# Altium PCB New_LXe_twr.PcbDoc (part 2 of 5)
Units mm, origin at the board's own origin, x right, y up, seen from the top; angles counter-clockwise.
Board outline 130 x 150 mm, 6 copper layers (Top Layer, Internal Plane 1, MidLayer1, MidLayer2, Internal Plane 2, Bottom Layer); 673 components, 504 nets, 5569 pads, 803 vias.
Unrouted connection lines stored in the file: 633.
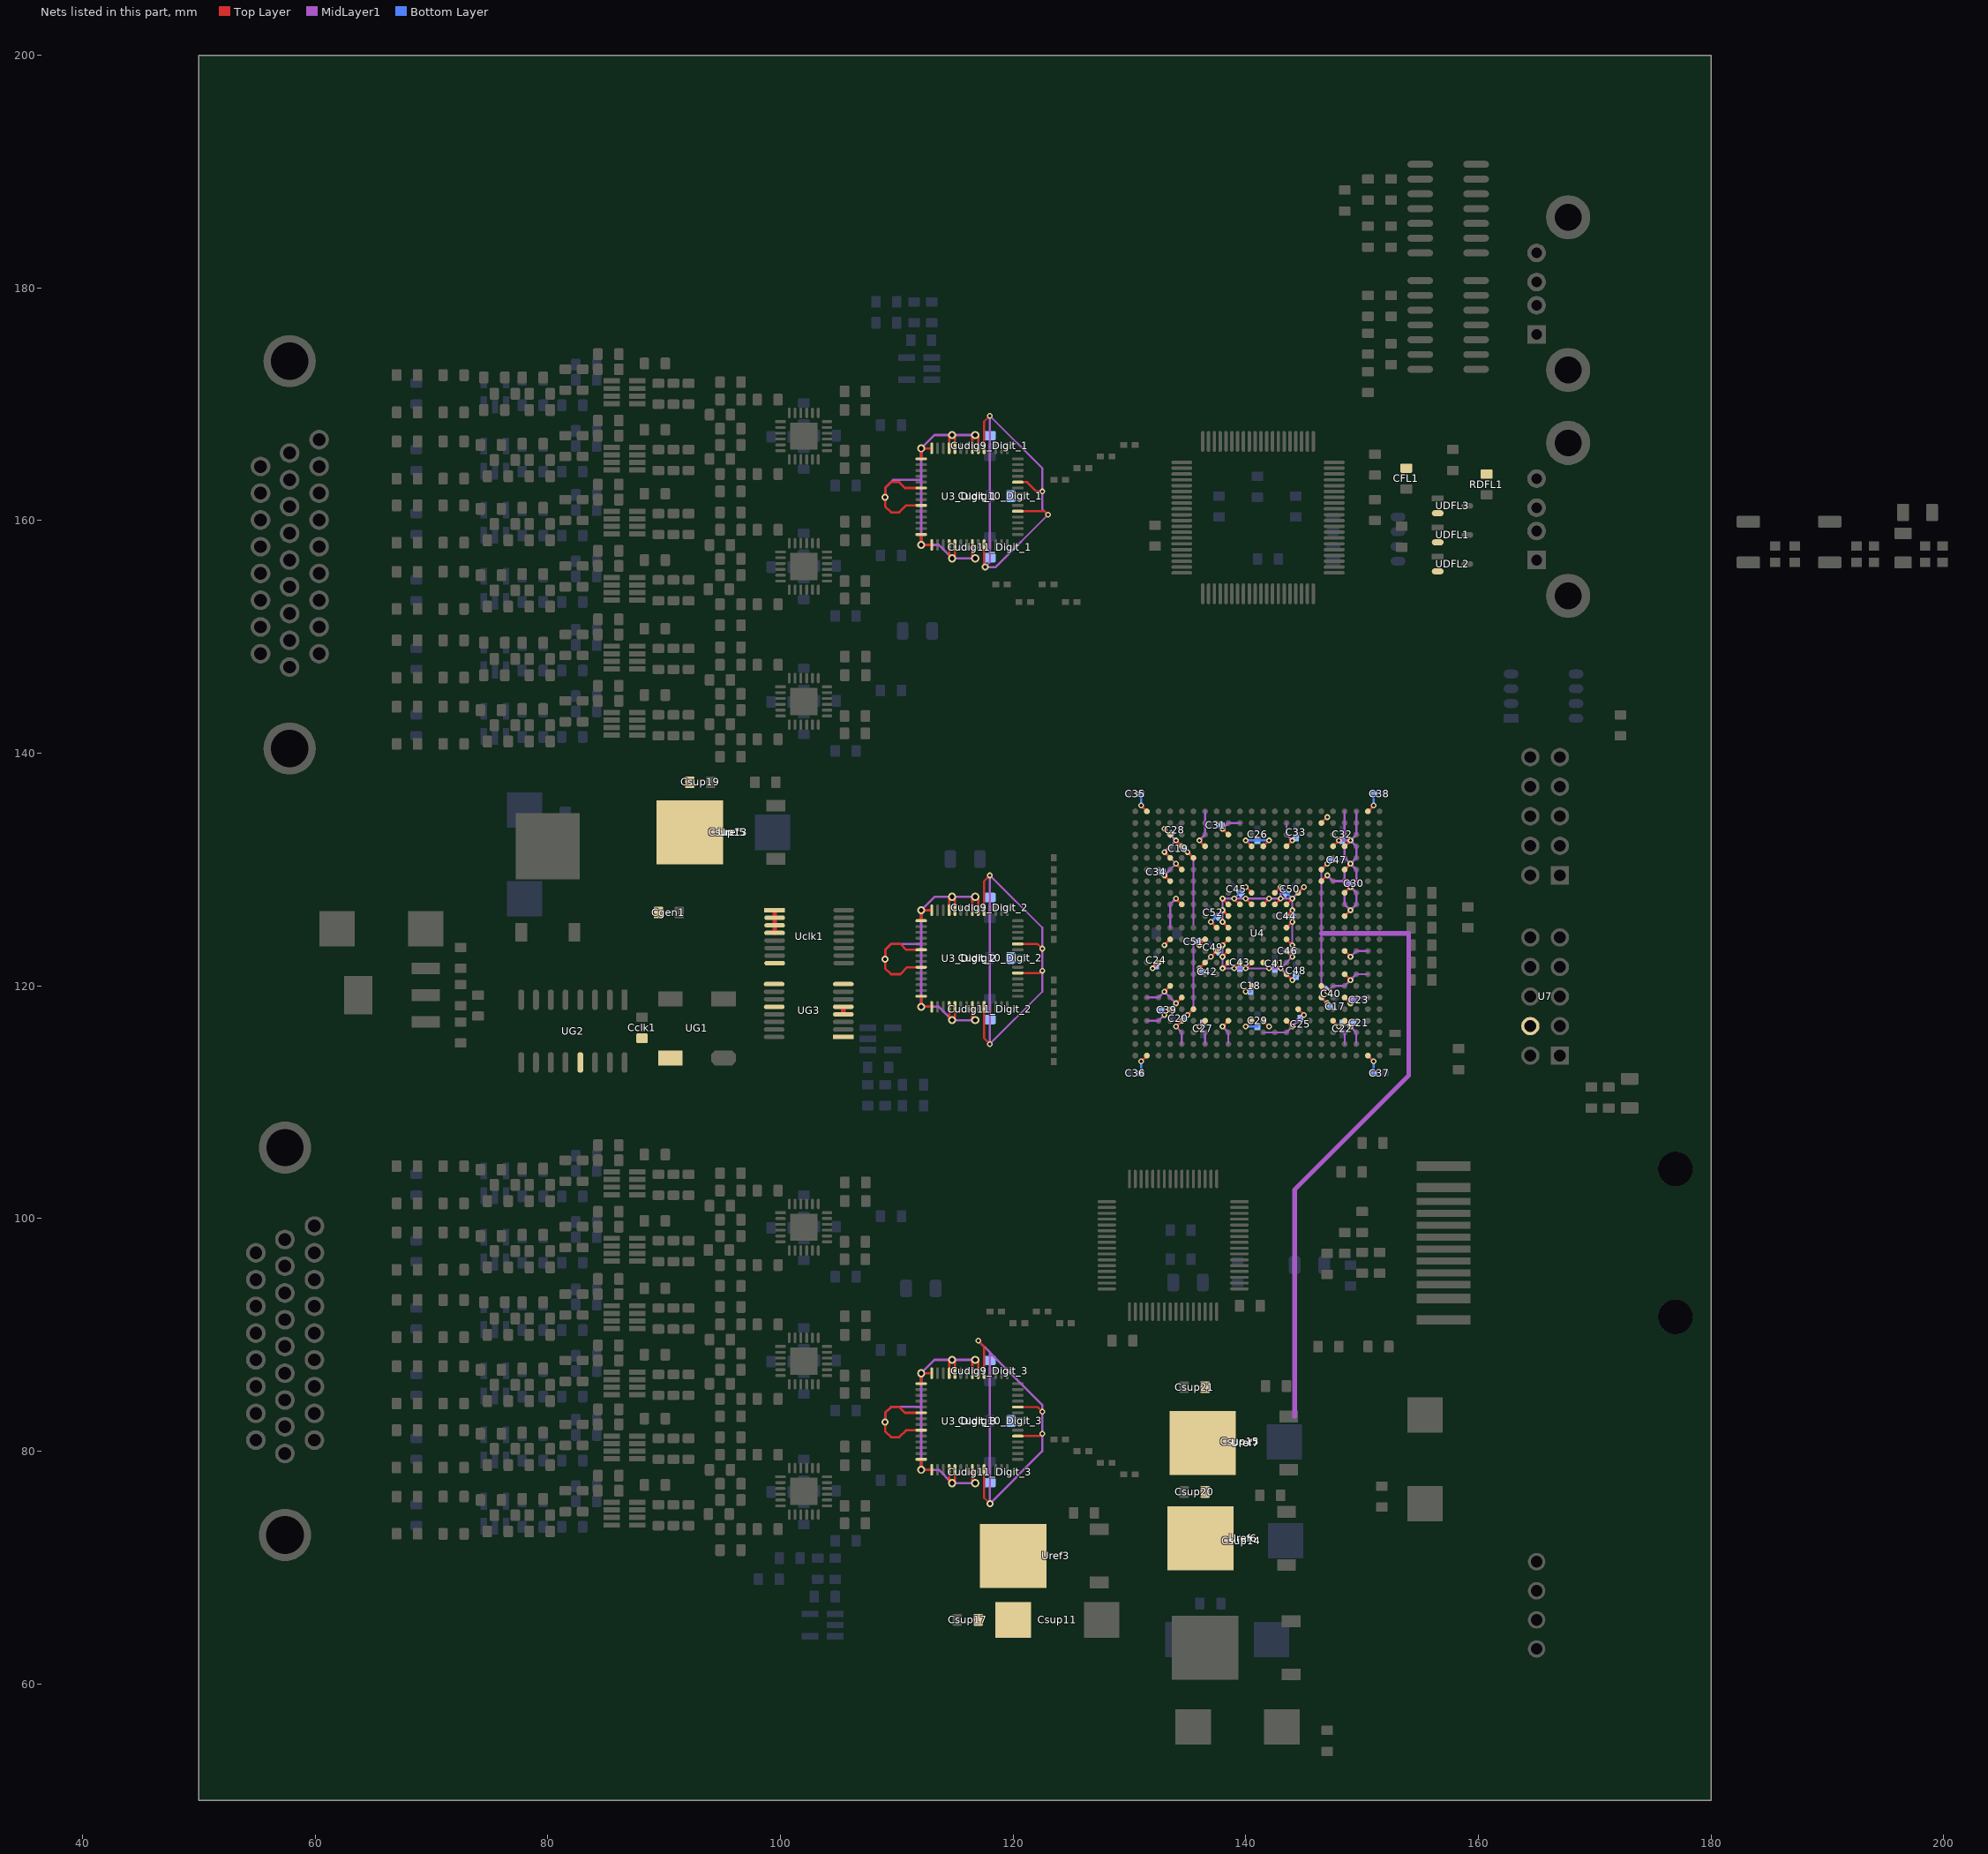
[diagram p6: the nets of this part, all layers, seen from the top]

## Components (designator, comment, footprint, x,y, rotation, side; value= is the part's Value field where it differs from the comment) (continued)
Rsh43_Digit_1 "91" ? 83,154.3 r90 top (schematic designator Rsh43)
Rsh43_Digit_2 "91" ? 83,97.5 r90 top (schematic designator Rsh43)
Rsh43_Digit_3 "91" ? 83,74.8 r90 top (schematic designator Rsh43)
Rsh44_Digit_1 "1k" ? 81.2,153 r0 bottom (schematic designator Rsh44)
Rsh44_Digit_2 "1k" ? 81.2,96.2 r0 bottom (schematic designator Rsh44)
Rsh44_Digit_3 "1k" ? 81.2,73.5 r0 bottom (schematic designator Rsh44)
Rsh45_Digit_1 "220" ? 81.5,173 r270 top (schematic designator Rsh45)
Rsh45_Digit_2 "220" ? 81.5,150.2 r270 top (schematic designator Rsh45)
Rsh45_Digit_3 "220" ? 81.5,93.5 r270 top (schematic designator Rsh45)
Rsh46_Digit_1 "220" ? 81.5,167.3 r270 top (schematic designator Rsh46)
Rsh46_Digit_2 "220" ? 81.5,144.5 r270 top (schematic designator Rsh46)
Rsh46_Digit_3 "220" ? 81.5,87.8 r270 top (schematic designator Rsh46)
Rsh47_Digit_1 "220" ? 81.5,161.8 r270 top (schematic designator Rsh47)
Rsh47_Digit_2 "220" ? 81.5,105 r270 top (schematic designator Rsh47)
Rsh47_Digit_3 "220" ? 81.5,82.3 r270 top (schematic designator Rsh47)
Rsh48_Digit_1 "220" ? 81.5,156.1 r270 top (schematic designator Rsh48)
Rsh48_Digit_2 "220" ? 81.5,99.3 r270 top (schematic designator Rsh48)
Rsh48_Digit_3 "220" ? 81.5,76.6 r270 top (schematic designator Rsh48)
Rsh49_Digit_1 "220" ? 84.3,173 r0 top (schematic designator Rsh49)
Rsh49_Digit_2 "220" ? 84.3,150.2 r0 top (schematic designator Rsh49)
Rsh49_Digit_3 "220" ? 84.3,93.5 r0 top (schematic designator Rsh49)
Rsh50_Digit_1 "220" ? 84.3,167.3 r0 top (schematic designator Rsh50)
Rsh50_Digit_2 "220" ? 84.3,144.5 r0 top (schematic designator Rsh50)
Rsh50_Digit_3 "220" ? 84.3,87.8 r0 top (schematic designator Rsh50)
Rsh51_Digit_1 "220" ? 84.3,161.8 r0 top (schematic designator Rsh51)
Rsh51_Digit_2 "220" ? 84.3,105 r0 top (schematic designator Rsh51)
Rsh51_Digit_3 "220" ? 84.3,82.3 r0 top (schematic designator Rsh51)
Rsh52_Digit_1 "220" ? 84.3,156.1 r0 top (schematic designator Rsh52)
Rsh52_Digit_2 "220" ? 84.3,99.3 r0 top (schematic designator Rsh52)
Rsh52_Digit_3 "220" ? 84.3,76.6 r0 top (schematic designator Rsh52)
Rsh53_Digit_1 "270" ? 89.5,170 r90 top (schematic designator Rsh53)
Rsh53_Digit_2 "270" ? 89.5,147.2 r90 top (schematic designator Rsh53)
Rsh53_Digit_3 "270" ? 89.5,90.5 r90 top (schematic designator Rsh53)
Rsh54_Digit_1 "360" ? 90.8,170 r90 top (schematic designator Rsh54)
Rsh54_Digit_2 "360" ? 90.8,147.2 r90 top (schematic designator Rsh54)
Rsh54_Digit_3 "360" ? 90.8,90.5 r90 top (schematic designator Rsh54)
Rsh55_Digit_1 "270" ? 89.5,164.3 r90 top (schematic designator Rsh55)
Rsh55_Digit_2 "270" ? 89.5,141.5 r90 top (schematic designator Rsh55)
Rsh55_Digit_3 "270" ? 89.5,84.8 r90 top (schematic designator Rsh55)
Rsh56_Digit_1 "360" ? 90.8,164.3 r90 top (schematic designator Rsh56)
Rsh56_Digit_2 "360" ? 90.8,141.5 r90 top (schematic designator Rsh56)
Rsh56_Digit_3 "360" ? 90.8,84.8 r90 top (schematic designator Rsh56)
Rsh57_Digit_1 "270" ? 89.5,158.8 r90 top (schematic designator Rsh57)
Rsh57_Digit_2 "270" ? 89.5,102 r90 top (schematic designator Rsh57)
Rsh57_Digit_3 "270" ? 89.5,79.3 r90 top (schematic designator Rsh57)
Rsh58_Digit_1 "360" ? 90.8,158.8 r90 top (schematic designator Rsh58)
Rsh58_Digit_2 "360" ? 90.8,102 r90 top (schematic designator Rsh58)
Rsh58_Digit_3 "360" ? 90.8,79.3 r90 top (schematic designator Rsh58)
Rsh59_Digit_1 "270" ? 89.5,153.1 r90 top (schematic designator Rsh59)
Rsh59_Digit_2 "270" ? 89.5,96.3 r90 top (schematic designator Rsh59)
Rsh59_Digit_3 "270" ? 89.5,73.6 r90 top (schematic designator Rsh59)
Rsh60_Digit_1 "360" ? 90.8,153.1 r90 top (schematic designator Rsh60)
Rsh60_Digit_2 "360" ? 90.8,96.3 r90 top (schematic designator Rsh60)
Rsh60_Digit_3 "360" ? 90.8,73.6 r90 top (schematic designator Rsh60)
RSL1 "1K2" chip0603#1 150.5,187.55 r90 top
RSL2 "56" chip0603#1 150.5,185.3 r270 top
RSL3 "56" chip0603#1 148.5,186.6 r90 top
RSL4 "1K2" chip0603#1 152.5,183.5 r90 top
RSL5 "1K2" chip0603#1 150.5,177.55 r90 top
RSL6 "56" chip0603#1 150.5,172.8 r270 top
RSL7 "56" chip0603#1 150.5,176.1 r270 top
RSL8 "1K2" chip0603#1 152.5,173.4 r90 top
U1_Digit_1 "AD4932-2" CP-24-13 100,168.5 r0 top (schematic designator U1)
U1_Digit_2 "AD4932-2" CP-24-13 100,145.7 r0 top (schematic designator U1)
U1_Digit_3 "AD4932-2" CP-24-13 100,89 r0 top (schematic designator U1)
U2_Digit_1 "AD4932-2" CP-24-13 100,157.3 r0 top (schematic designator U2)
U2_Digit_2 "AD4932-2" CP-24-13 100,100.5 r0 top (schematic designator U2)
U2_Digit_3 "AD4932-2" CP-24-13 100,77.8 r0 top (schematic designator U2)
U3_Digit_1 "ADC3424 / ADC3444" PQFN-56 119.5,166.2 r270 top (schematic designator U3)
U3_Digit_2 "ADC3424 / ADC3444" PQFN-56 119.5,126.5 r270 top (schematic designator U3)
U3_Digit_3 "ADC3424 / ADC3444" PQFN-56 119.5,86.7 r270 top (schematic designator U3)
U4 "EP4CE40F23C7" FBGA484 141,124.5 r180 top
U5 "Active Serial" IDC10 167,129.5 r90 top
U6 "EPCS16SI8N" 8SO200 162.8,143 r90 bottom
U7 "JTAG" IDC10 167,114 r90 top
U8 "LXT972A" TQFP64 130,92 r0 top
Uclk1 "IDT_854105I" TSSOP16 99.5,126.5 r0 top
UDFL1 "BAV99" SOT323 156.5,159.4 r270 top
UDFL2 "BAV99" SOT323 156.5,156.9 r270 top
UDFL3 "BAV99" SOT323 156.5,161.9 r270 top
UFL1 "DS92LV16TVHG" VHG80A_N 141.05,160.25 r0 top
UFL2 "DS90LV001" 8SO200 147.5,156.5 r90 bottom
UG1 "KXO-97" SG-636 95.1,113.8 r180 top
UG2 "MAX4651PP" 16SOIC150 86.6,118.8 r270 top
UG3 "5V926(PLL)" TSSOP16 105.4,115.6 r180 top
UL1 "DS36C200" M14A_N 157.4,186.81 r0 top
UL2 "DS36C200" M14A_N 157.4,176.81 r0 top
Uref2 "NCP1117-5V" 369A-13 80,128.3 r0 top
Uref3 "NCP1117-1.8V" 369A-13 123.7,71 r90 top
Uref4 "NCP1117-3.3V" 369A-13 140.2,63.1 r90 top
Uref5 "NCP1117-3.3V" 369A-13 95.9,133.2 r90 top
Uref6 "NCP1117-2.5V" 369A-13 139.8,72.5 r90 top
Uref7 "LD1117-1.25V" 369A-13 140,80.7 r90 top
Uref8 "LM337" SOT223_N 66.6,119.2 r180 top
Ush1_Digit_1 "AD8014" RT-5 75.45,171.025 r180 bottom (schematic designator Ush1)
Ush1_Digit_2 "AD8014" RT-5 75.45,148.225 r180 bottom (schematic designator Ush1)
Ush1_Digit_3 "AD8014" RT-5 75.45,91.525 r180 bottom (schematic designator Ush1)
Ush2_Digit_1 "AD8014" RT-5 75.45,165.325 r180 bottom (schematic designator Ush2)
Ush2_Digit_2 "AD8014" RT-5 75.45,142.525 r180 bottom (schematic designator Ush2)
Ush2_Digit_3 "AD8014" RT-5 75.45,85.825 r180 bottom (schematic designator Ush2)
Ush3_Digit_1 "AD8014" RT-5 75.45,159.825 r180 bottom (schematic designator Ush3)
Ush3_Digit_2 "AD8014" RT-5 75.45,103.025 r180 bottom (schematic designator Ush3)
Ush3_Digit_3 "AD8014" RT-5 75.45,80.325 r180 bottom (schematic designator Ush3)
Ush4_Digit_1 "AD8014" RT-5 75.45,154.125 r180 bottom (schematic designator Ush4)
Ush4_Digit_2 "AD8014" RT-5 75.45,97.325 r180 bottom (schematic designator Ush4)
Ush4_Digit_3 "AD8014" RT-5 75.45,74.625 r180 bottom (schematic designator Ush4)
Ush5_Digit_1 "AD8039" SOT23-8 86.6,171.025 r270 top (schematic designator Ush5)
Ush5_Digit_2 "AD8039" SOT23-8 86.6,148.225 r270 top (schematic designator Ush5)
Ush5_Digit_3 "AD8039" SOT23-8 86.6,91.525 r270 top (schematic designator Ush5)
Ush6_Digit_1 "AD8039" SOT23-8 86.6,165.325 r270 top (schematic designator Ush6)
Ush6_Digit_2 "AD8039" SOT23-8 86.6,142.525 r270 top (schematic designator Ush6)
Ush6_Digit_3 "AD8039" SOT23-8 86.6,85.825 r270 top (schematic designator Ush6)
Ush7_Digit_1 "AD8039" SOT23-8 86.6,159.825 r270 top (schematic designator Ush7)
Ush7_Digit_2 "AD8039" SOT23-8 86.6,103.025 r270 top (schematic designator Ush7)
Ush7_Digit_3 "AD8039" SOT23-8 86.6,80.325 r270 top (schematic designator Ush7)
Ush8_Digit_1 "AD8039" SOT23-8 86.6,154.125 r270 top (schematic designator Ush8)
Ush8_Digit_2 "AD8039" SOT23-8 86.6,97.325 r270 top (schematic designator Ush8)
Ush8_Digit_3 "AD8039" SOT23-8 86.6,74.625 r270 top (schematic designator Ush8)
Usup1_Digit_1 "AD8005ART" SOT23-5 111.925,173.05 r270 bottom (schematic designator Usup1)
Usup1_Digit_2 "AD8005ART" SOT23-5 108.575,115.45 r90 bottom (schematic designator Usup1)
Usup1_Digit_3 "AD8005ART" SOT23-5 103.625,65.05 r270 bottom (schematic designator Usup1)
VDLED1 "LED" LED0805 196.5,156.4 r90 top
VDLED2 "LED" LED1206 190.2,156.4 r90 top
VDLED3 "LED" LED1206 183.2,156.4 r90 top
VDLED4 "LED" LED0805 173,109.5 r90 top
XFL "USB_A" USB2.5-2H4B 178.49,160.1 r0 top
XSL "USB_A" USB2.5-2H4B 178.49,179.5 r0 top

## Footprints (in the part's own frame and the unit in brackets; to place one, negate y for a bottom-side part, rotate by r counter-clockwise, add the part's x,y. Pads: shape width x height; smd on the part's side, far side on the other; paste and mask are expansions set on the pad)
8SO200 [mil]
  rect 30x50 smd: 1(0,0)
  oval 30x50 smd: 2(50,0) 3(100,0) 4(150,0) 5(150,220) 6(100,220) 7(50,220) 8(0,220)
  silkscreen extent -20,40 170,180
16SOIC150 [mil]
  rect 70x20 smd: 1(0,0)
  oval 70x20 smd: 2(0,-50) 3(0,-100) 4(0,-150) 5(0,-200) 6(0,-250) 7(0,-300) 8(0,-350) 9(212,-350) 10(212,-300) 11(212,-250) 12(212,-200) 13(212,-150) 14(212,-100) 15(212,-50) 16(212,0)
  silkscreen extent 31,-375 181,25
369A-13 [mm] "D-PAK/TO-252-AA; 3 Leads (1 Cropped); Body 10.3 (inc. leads) x 6.7 mm (LxW max)"
  rect 1x1.6 smd: 1(-2.285,-3.7) 3(2.285,-3.7)
  rect 5.5x5.7 smd: 4(0,3.7)
  silkscreen extent -3.09,-4.4 3.09,6.45
0402 [mm] "Chip Capacitor, Body 1.0x0.5mm, IPC High Density"
  rect 0.6x0.5 smd: 1(-0.5,0) 2(0.5,0)
  body extent -0.55,-0.3 0.55,0.3, height 1.3
1608[0603] [mm] "Chip Capacitor, Body 1.6x0.8mm, IPC High Density"
  rect 0.8x0.9 smd: 1(-0.7,0) 2(0.7,0)
  body extent -0.87,-0.48 0.87,0.48, height 1.3
CEL-SMD300 [mil]
  rect 120x120 smd: +(0,0) -(300,0)
  silkscreen extent -10,-90 310,90
chip0603#1 [mm]
  rrect20% 0.8x1 smd: 1(0,0) 2(1.8,0)
  silkscreen extent -0.6,-0.8 2.4,0.8
chip0603#2 [mm]
  rect 0.6x1 smd: 1(0,0) 2(1.6,0)
  silkscreen extent -0.6,-0.8 2.2,0.8
chip0805#1 [mm]
  rrect20% 1x1.5 smd: 1(0,0) 2(2.5,0)
  silkscreen extent 0.25,-0.64 2.29,0.64
chip0805#2 [mm]
  oval 0.508x1.524 smd: 1(-0.254,0) 1(0,0) 1(0.254,0) 2(2.286,0) 2(2.54,0) 2(2.794,0)
  oval 1.016x0.508 smd: 1(0,-0.508) 1(0,0.508) 2(2.54,-0.508) 2(2.54,0.508)
  silkscreen extent 0.25,-0.64 2.29,0.64
CP-24-13 [mm]
  rect 0.9x0.25 smd: 1(0,0)
  oval 0.9x0.25 smd: 2(0,-0.5) 3(0,-1) 4(0,-1.5) 5(0,-2) 6(0,-2.5) 13(4,-2.5) 14(4,-2) 15(4,-1.5) 16(4,-1) 17(4,-0.5) 18(4,0)
  oval 0.25x0.9 smd: 7(0.75,-3.25) 8(1.25,-3.25) 9(1.75,-3.25) 10(2.25,-3.25) 11(2.75,-3.25) 12(3.25,-3.25) 19(3.25,0.75) 20(2.75,0.75) 21(2.25,0.75) 22(1.75,0.75) 23(1.25,0.75) 24(0.75,0.75)
  rect 2.34x2.34 smd: 25(2,-1.25)
  silkscreen extent 0,-3.25 4,0.75
CWF-4R [mm]
  round 1.5 hole 1: 1(0,0) 2(0,2.5) 3(0,5) 4(0,7.5)
  silkscreen extent -3.5,-3.35 14.5,10.85
DHR-F-26 [mm]
  round 1.69 hole 1.09: 1(8.15,-2.54) 2(10.45,-2.54) 3(12.75,-2.54) 4(15.05,-2.54) 5(17.35,-2.54) 6(19.65,-2.54) 7(21.95,-2.54) 8(24.25,-2.54) 9(26.55,-2.54) 10(7,0) 11(9.3,0) 12(11.6,0) 13(13.9,0) 14(16.2,0) 15(18.5,0) 16(20.8,0) 17(23.1,0) 18(25.4,0) 19(8.15,2.5) 20(10.45,2.5) 21(12.75,2.5) 22(15.05,2.5) 23(17.35,2.5) 24(19.65,2.5) 25(21.95,2.5) 26(24.25,2.5)
  round 4.5 hole 3.24: 27(0,0)
  round 4.5 hole 3.2: 28(33.3,0)
  silkscreen extent -3.05,-4.83 36.35,18.08
FBGA484 [mm] "BGA, 484-Leads, Body 23x23mm, Pitch 1mm"
  round 0.5 smd: A1(-10.5,10.5) A2(-9.5,10.5) A3(-8.5,10.5) A4(-7.5,10.5) A5(-6.5,10.5) A6(-5.5,10.5) A7(-4.5,10.5) A8(-3.5,10.5) A9(-2.5,10.5) A10(-1.5,10.5) A11(-0.5,10.5) A12(0.5,10.5) A13(1.5,10.5) A14(2.5,10.5) A15(3.5,10.5) A16(4.5,10.5) A17(5.5,10.5) A18(6.5,10.5) A19(7.5,10.5) A20(8.5,10.5) A21(9.5,10.5) A22(10.5,10.5) AA1(-10.5,-9.5) AA2(-9.5,-9.5) AA3(-8.5,-9.5) AA4(-7.5,-9.5) AA5(-6.5,-9.5) AA6(-5.5,-9.5) AA7(-4.5,-9.5) AA8(-3.5,-9.5) AA9(-2.5,-9.5) AA10(-1.5,-9.5) AA11(-0.5,-9.5) AA12(0.5,-9.5) AA13(1.5,-9.5) AA14(2.5,-9.5) AA15(3.5,-9.5) AA16(4.5,-9.5) AA17(5.5,-9.5) AA18(6.5,-9.5) AA19(7.5,-9.5) AA20(8.5,-9.5) AA21(9.5,-9.5) AA22(10.5,-9.5) AB1(-10.5,-10.5) AB2(-9.5,-10.5) AB3(-8.5,-10.5) AB4(-7.5,-10.5) AB5(-6.5,-10.5) AB6(-5.5,-10.5) AB7(-4.5,-10.5) AB8(-3.5,-10.5) AB9(-2.5,-10.5) AB10(-1.5,-10.5) AB11(-0.5,-10.5) AB12(0.5,-10.5) AB13(1.5,-10.5) AB14(2.5,-10.5) AB15(3.5,-10.5) AB16(4.5,-10.5) AB17(5.5,-10.5) AB18(6.5,-10.5) AB19(7.5,-10.5) AB20(8.5,-10.5) AB21(9.5,-10.5) AB22(10.5,-10.5) B1(-10.5,9.5) B2(-9.5,9.5) B3(-8.5,9.5) B4(-7.5,9.5) B5(-6.5,9.5) B6(-5.5,9.5) B7(-4.5,9.5) B8(-3.5,9.5) B9(-2.5,9.5) B10(-1.5,9.5) B11(-0.5,9.5) B12(0.5,9.5) B13(1.5,9.5) B14(2.5,9.5) B15(3.5,9.5) B16(4.5,9.5) B17(5.5,9.5) B18(6.5,9.5) B19(7.5,9.5) B20(8.5,9.5) B21(9.5,9.5) B22(10.5,9.5) C1(-10.5,8.5) C2(-9.5,8.5) C3(-8.5,8.5) C4(-7.5,8.5) C5(-6.5,8.5) C6(-5.5,8.5) C7(-4.5,8.5) C8(-3.5,8.5) C9(-2.5,8.5) C10(-1.5,8.5) C11(-0.5,8.5) C12(0.5,8.5) C13(1.5,8.5) C14(2.5,8.5) C15(3.5,8.5) C16(4.5,8.5) C17(5.5,8.5) C18(6.5,8.5) C19(7.5,8.5) C20(8.5,8.5) C21(9.5,8.5) C22(10.5,8.5) D1(-10.5,7.5) D2(-9.5,7.5) D3(-8.5,7.5) D4(-7.5,7.5) D5(-6.5,7.5) D6(-5.5,7.5) D7(-4.5,7.5) D8(-3.5,7.5) D9(-2.5,7.5) D10(-1.5,7.5) D11(-0.5,7.5) D12(0.5,7.5) D13(1.5,7.5) D14(2.5,7.5) D15(3.5,7.5) D16(4.5,7.5) D17(5.5,7.5) D18(6.5,7.5) D19(7.5,7.5) D20(8.5,7.5) D21(9.5,7.5) D22(10.5,7.5) E1(-10.5,6.5) E2(-9.5,6.5) E3(-8.5,6.5) E4(-7.5,6.5) E5(-6.5,6.5) E6(-5.5,6.5) E7(-4.5,6.5) E8(-3.5,6.5) E9(-2.5,6.5) E10(-1.5,6.5) E11(-0.5,6.5) E12(0.5,6.5) E13(1.5,6.5) E14(2.5,6.5) E15(3.5,6.5) E16(4.5,6.5) E17(5.5,6.5) E18(6.5,6.5) E19(7.5,6.5) E20(8.5,6.5) E21(9.5,6.5) E22(10.5,6.5) F1(-10.5,5.5) F2(-9.5,5.5) F3(-8.5,5.5) F4(-7.5,5.5) F5(-6.5,5.5) F6(-5.5,5.5) F7(-4.5,5.5) F8(-3.5,5.5) F9(-2.5,5.5) F10(-1.5,5.5) F11(-0.5,5.5) F12(0.5,5.5) F13(1.5,5.5) F14(2.5,5.5) F15(3.5,5.5) F16(4.5,5.5) F17(5.5,5.5) F18(6.5,5.5) F19(7.5,5.5) F20(8.5,5.5) F21(9.5,5.5) F22(10.5,5.5) G1(-10.5,4.5) G2(-9.5,4.5) G3(-8.5,4.5) G4(-7.5,4.5) G5(-6.5,4.5) G6(-5.5,4.5) G7(-4.5,4.5) G8(-3.5,4.5) G9(-2.5,4.5) G10(-1.5,4.5) G11(-0.5,4.5) G12(0.5,4.5) G13(1.5,4.5) G14(2.5,4.5) G15(3.5,4.5) G16(4.5,4.5) G17(5.5,4.5) G18(6.5,4.5) G19(7.5,4.5) G20(8.5,4.5) G21(9.5,4.5) G22(10.5,4.5) H1(-10.5,3.5) H2(-9.5,3.5) H3(-8.5,3.5) H4(-7.5,3.5) H5(-6.5,3.5) H6(-5.5,3.5) H7(-4.5,3.5) H8(-3.5,3.5) H9(-2.5,3.5) H10(-1.5,3.5) H11(-0.5,3.5) H12(0.5,3.5) H13(1.5,3.5) H14(2.5,3.5) H15(3.5,3.5) H16(4.5,3.5) H17(5.5,3.5) H18(6.5,3.5) H19(7.5,3.5) H20(8.5,3.5) H21(9.5,3.5) H22(10.5,3.5) J1(-10.5,2.5) J2(-9.5,2.5) J3(-8.5,2.5) J4(-7.5,2.5) J5(-6.5,2.5) J6(-5.5,2.5) J7(-4.5,2.5) J8(-3.5,2.5) J9(-2.5,2.5) J10(-1.5,2.5) J11(-0.5,2.5) J12(0.5,2.5) J13(1.5,2.5) J14(2.5,2.5) J15(3.5,2.5) J16(4.5,2.5) J17(5.5,2.5) J18(6.5,2.5) J19(7.5,2.5) J20(8.5,2.5) J21(9.5,2.5) J22(10.5,2.5) K1(-10.5,1.5) K2(-9.5,1.5) K3(-8.5,1.5) K4(-7.5,1.5) K5(-6.5,1.5) K6(-5.5,1.5) K7(-4.5,1.5) K8(-3.5,1.5) K9(-2.5,1.5) K10(-1.5,1.5) K11(-0.5,1.5) K12(0.5,1.5) K13(1.5,1.5) K14(2.5,1.5) K15(3.5,1.5) K16(4.5,1.5) K17(5.5,1.5) K18(6.5,1.5) K19(7.5,1.5) K20(8.5,1.5) K21(9.5,1.5) K22(10.5,1.5) L1(-10.5,0.5) L2(-9.5,0.5) L3(-8.5,0.5) L4(-7.5,0.5) L5(-6.5,0.5) L6(-5.5,0.5) L7(-4.5,0.5) L8(-3.5,0.5) L9(-2.5,0.5) L10(-1.5,0.5) L11(-0.5,0.5) L12(0.5,0.5) L13(1.5,0.5) L14(2.5,0.5) L15(3.5,0.5) L16(4.5,0.5) L17(5.5,0.5) L18(6.5,0.5) L19(7.5,0.5) L20(8.5,0.5) L21(9.5,0.5) L22(10.5,0.5) M1(-10.5,-0.5) M2(-9.5,-0.5) M3(-8.5,-0.5) M4(-7.5,-0.5) M5(-6.5,-0.5) M6(-5.5,-0.5) M7(-4.5,-0.5) M8(-3.5,-0.5) M9(-2.5,-0.5) M10(-1.5,-0.5) M11(-0.5,-0.5) M12(0.5,-0.5) M13(1.5,-0.5) M14(2.5,-0.5) M15(3.5,-0.5) M16(4.5,-0.5) M17(5.5,-0.5) M18(6.5,-0.5) M19(7.5,-0.5) M20(8.5,-0.5) M21(9.5,-0.5) M22(10.5,-0.5) N1(-10.5,-1.5) N2(-9.5,-1.5) N3(-8.5,-1.5) N4(-7.5,-1.5) N5(-6.5,-1.5) N6(-5.5,-1.5) N7(-4.5,-1.5) N8(-3.5,-1.5) N9(-2.5,-1.5) N10(-1.5,-1.5) N11(-0.5,-1.5) N12(0.5,-1.5) N13(1.5,-1.5) N14(2.5,-1.5) N15(3.5,-1.5) N16(4.5,-1.5) N17(5.5,-1.5) N18(6.5,-1.5) N19(7.5,-1.5) N20(8.5,-1.5) N21(9.5,-1.5) N22(10.5,-1.5) P1(-10.5,-2.5) P2(-9.5,-2.5) P3(-8.5,-2.5) P4(-7.5,-2.5) P5(-6.5,-2.5) P6(-5.5,-2.5) P7(-4.5,-2.5) P8(-3.5,-2.5) P9(-2.5,-2.5) P10(-1.5,-2.5) P11(-0.5,-2.5) P12(0.5,-2.5) P13(1.5,-2.5) P14(2.5,-2.5) P15(3.5,-2.5) P16(4.5,-2.5) P17(5.5,-2.5) P18(6.5,-2.5) P19(7.5,-2.5) P20(8.5,-2.5) P21(9.5,-2.5) P22(10.5,-2.5) R1(-10.5,-3.5) R2(-9.5,-3.5) R3(-8.5,-3.5) R4(-7.5,-3.5) R5(-6.5,-3.5) R6(-5.5,-3.5) R7(-4.5,-3.5) R8(-3.5,-3.5) R9(-2.5,-3.5) R10(-1.5,-3.5) R11(-0.5,-3.5) R12(0.5,-3.5) R13(1.5,-3.5) R14(2.5,-3.5) R15(3.5,-3.5) R16(4.5,-3.5) R17(5.5,-3.5) R18(6.5,-3.5) R19(7.5,-3.5) R20(8.5,-3.5) R21(9.5,-3.5) R22(10.5,-3.5) T1(-10.5,-4.5) T2(-9.5,-4.5) T3(-8.5,-4.5) T4(-7.5,-4.5) T5(-6.5,-4.5) T6(-5.5,-4.5) T7(-4.5,-4.5) T8(-3.5,-4.5) T9(-2.5,-4.5) T10(-1.5,-4.5) T11(-0.5,-4.5) T12(0.5,-4.5) T13(1.5,-4.5) T14(2.5,-4.5) T15(3.5,-4.5) T16(4.5,-4.5) T17(5.5,-4.5) T18(6.5,-4.5) T19(7.5,-4.5) T20(8.5,-4.5) T21(9.5,-4.5) T22(10.5,-4.5) U1(-10.5,-5.5) U2(-9.5,-5.5) U3(-8.5,-5.5) U4(-7.5,-5.5) U5(-6.5,-5.5) U6(-5.5,-5.5) U7(-4.5,-5.5) U8(-3.5,-5.5) U9(-2.5,-5.5) U10(-1.5,-5.5) U11(-0.5,-5.5) U12(0.5,-5.5) U13(1.5,-5.5) U14(2.5,-5.5) U15(3.5,-5.5) U16(4.5,-5.5) U17(5.5,-5.5) U18(6.5,-5.5) U19(7.5,-5.5) U20(8.5,-5.5) U21(9.5,-5.5) U22(10.5,-5.5) V1(-10.5,-6.5) V2(-9.5,-6.5) V3(-8.5,-6.5) V4(-7.5,-6.5) V5(-6.5,-6.5) V6(-5.5,-6.5) V7(-4.5,-6.5) V8(-3.5,-6.5) V9(-2.5,-6.5) V10(-1.5,-6.5) V11(-0.5,-6.5) V12(0.5,-6.5) V13(1.5,-6.5) V14(2.5,-6.5) V15(3.5,-6.5) V16(4.5,-6.5) V17(5.5,-6.5) V18(6.5,-6.5) V19(7.5,-6.5) V20(8.5,-6.5) V21(9.5,-6.5) V22(10.5,-6.5) W1(-10.5,-7.5) W2(-9.5,-7.5) W3(-8.5,-7.5) W4(-7.5,-7.5) W5(-6.5,-7.5) W6(-5.5,-7.5) W7(-4.5,-7.5) W8(-3.5,-7.5) W9(-2.5,-7.5) W10(-1.5,-7.5) W11(-0.5,-7.5) W12(0.5,-7.5) W13(1.5,-7.5) W14(2.5,-7.5) W15(3.5,-7.5) W16(4.5,-7.5) W17(5.5,-7.5) W18(6.5,-7.5) W19(7.5,-7.5) W20(8.5,-7.5) W21(9.5,-7.5) W22(10.5,-7.5) Y1(-10.5,-8.5) Y2(-9.5,-8.5) Y3(-8.5,-8.5) Y4(-7.5,-8.5) Y5(-6.5,-8.5) Y6(-5.5,-8.5) Y7(-4.5,-8.5) Y8(-3.5,-8.5) Y9(-2.5,-8.5) Y10(-1.5,-8.5) Y11(-0.5,-8.5) Y12(0.5,-8.5) Y13(1.5,-8.5) Y14(2.5,-8.5) Y15(3.5,-8.5) Y16(4.5,-8.5) Y17(5.5,-8.5) Y18(6.5,-8.5) Y19(7.5,-8.5) Y20(8.5,-8.5) Y21(9.5,-8.5) Y22(10.5,-8.5)
  silkscreen extent -12.27,-11.5 11.5,11.5, body extent -11.5,-11.5 11.5,11.5, height 3.5
HR961160C [mm]
  rect 0.81x4.6 smd: 1(1.45,0) 2(3.29,0) 11(12.83,0) 12(14.67,0)
  rect 0.61x4.6 smd: 3(4.49,0) 4(5.51,0) 5(6.53,0) 6(7.55,0) 7(8.57,0) 8(9.59,0) 9(10.61,0) 10(11.63,0)
  round 3 hole 3: 13(1.7,19.92) 14(14.4,19.92)
  silkscreen extent 0,-2.25 16.1,28.73
IDC10 [mil]
  rect 62x62 hole 40: 1(0,0)
  round 62 hole 40: 2(0,100) 3(100,0) 4(100,100) 5(200,0) 6(200,100) 7(300,0) 8(300,100) 9(400,0) 10(400,100)
  silkscreen extent -50,-50 450,150
LED0805 [mm]
  rrect20% 1x1.5 smd: ANOD(2.5,0) CATH(0,0)
  silkscreen extent 0.25,-0.64 2.29,0.64
LED1206 [mm]
  rrect20% 1x2 smd: ANOD(3.5,0) CATH(0,0)
  silkscreen extent 0.25,-0.76 3.3,0.76
M14A_N [mm] "SOIC, 14-Leads, Body 8.6x3.9mm, Pitch 1.27mm, IPC Medium Density"
  oval 2.2x0.6 smd: 1(-2.4,3.81) 2(-2.4,2.54) 3(-2.4,1.27) 4(-2.4,0) 5(-2.4,-1.27) 6(-2.4,-2.54) 7(-2.4,-3.81) 8(2.4,-3.81) 9(2.4,-2.54) 10(2.4,-1.27) 11(2.4,0) 12(2.4,1.27) 13(2.4,2.54) 14(2.4,3.81)
  silkscreen extent -2.52,-4.4 0.9,4.78, body extent -2,-4.38 2,4.38, height 1.75
PQFN-56 [mm]
  rect 1.6x1.6 on Top Paste: 0(2.3,-1.4) 0(2.3,-3.2) 0(2.3,-5) 0(4.1,-1.4) 0(4.1,-5) 0(4.1,-3.2) 0(5.9,-1.4) 0(5.9,-5) 0(5.9,-3.2)
  rect 1x0.25 smd: 1(0,0)
  oval 1x0.25 smd: 2(0,-0.5) 3(0,-1) 4(0,-1.5) 5(0,-2) 6(0,-2.5) 7(0,-3) 8(0,-3.5) 9(0,-4) 10(0,-4.5) 11(0,-5) 12(0,-5.5) 13(0,-6) 14(0,-6.5) 29(8.3,-6.5) 30(8.3,-6) 31(8.3,-5.5) 32(8.3,-5) 33(8.3,-4.5) 34(8.3,-4) 35(8.3,-3.5) 36(8.3,-3) 37(8.3,-2.5) 38(8.3,-2) 39(8.3,-1.5) 40(8.3,-1) 41(8.3,-0.5) 42(8.3,0)
  oval 0.25x1 smd: 15(0.9,-7.4) 16(1.4,-7.4) 17(1.9,-7.4) 18(2.4,-7.4) 19(2.9,-7.4) 20(3.4,-7.4) 21(3.9,-7.4) 22(4.4,-7.4) 23(4.9,-7.4) 24(5.4,-7.4) 25(5.9,-7.4) 26(6.4,-7.4) 27(6.9,-7.4) 28(7.4,-7.4) 43(7.4,0.9) 44(6.9,0.9) 45(6.4,0.9) 46(5.9,0.9) 47(5.4,0.9) 48(4.9,0.9) 49(4.4,0.9) 50(3.9,0.9) 51(3.4,0.9) 52(2.9,0.9) 53(2.4,0.9) 54(1.9,0.9) 55(1.4,0.9) 56(0.9,0.9)
  Top Layer region: 1.1,-6.3 7.2,-6.3 7.2,-0.2 1.1,-0.2
  silkscreen extent 0.1,-7.3 8.2,0.8
RT-5 [mm] "SOT-23/SC-74A; 5 Leads; Body 3.1 x 3 mm, inc. leads (LxW max)"
  rect 0.55x1.45 smd: 1(-0.95,-1.075) 2(0,-1.075) 3(0.95,-1.075) 4(0.95,1.075) 5(-0.95,1.075)
  silkscreen extent -1.58,-1.35 1.55,0.9
SG-636 [mil]
  oct 83x50 smd: 1(0,0)
  rect 83x50 smd: 2(0,-200) 3(180,-200) 4(180,0)
  silkscreen extent -20,-310 200,110
SOT23-5 [mm] "SOT-23/SC-74A; 5 Leads; Body 3 x 3 mm, inc. leads (LxW max)"
  rect 0.55x1.45 smd: 1(-0.95,-1.075) 2(0,-1.075) 3(0.95,-1.075) 4(0.95,1.075) 5(-0.95,1.075)
  silkscreen extent -1.57,-1.35 1.55,0.9
SOT23-8 [mm] "SSOP; 8 Leads; Body Width 1.6 mm; Pitch 0.65 mm"
  rect 0.45x1.4 smd: 1(-0.975,-1.1) 2(-0.325,-1.1) 3(0.325,-1.1) 4(0.975,-1.1) 5(0.975,1.1) 6(0.325,1.1) 7(-0.325,1.1) 8(-0.975,1.1)
  silkscreen extent -1.87,-1.22 1.6,1.1
SOT223_N [mm] "SOT223, 4-Leads, Body 6.5x3.5mm, Pitch 2.3mm, Lead Span 7mm, IPC Medium Density"
  rect 2.4x1 smd: 1(-2.9,2.3) 2(-2.9,0) 3(-2.9,-2.3)
  rect 2.4x3.3 smd: 4(2.9,0)
  silkscreen extent -3.03,-3.35 1.4,3.47, body extent -1.85,-3.35 1.85,3.35, height 1.7
SOT323 [mil]
  rect 20x40 smd: 1(0,0)
  oval 20x40 smd: 2(50,0) 3(25,100)
  silkscreen extent -15,25 65,75
TQFP64 [mm]
  rect 0.25x1.6 smd: 1(0,0)
  oval 0.25x1.6 smd: 2(0.5,0) 3(1,0) 4(1.5,0) 5(2,0) 6(2.5,0) 7(3,0) 8(3.5,0) 9(4,0) 10(4.5,0) 11(5,0) 12(5.5,0) 13(6,0) 14(6.5,0) 15(7,0) 16(7.5,0) 33(7.5,11.4) 34(7,11.4) 35(6.5,11.4) 36(6,11.4) 37(5.5,11.4) 38(5,11.4) 39(4.5,11.4) 40(4,11.4) 41(3.5,11.4) 42(3,11.4) 43(2.5,11.4) 44(2,11.4) 45(1.5,11.4) 46(1,11.4) 47(0.5,11.4) 48(0,11.4)
  oval 1.6x0.25 smd: 17(9.45,1.95) 18(9.45,2.45) 19(9.45,2.95) 20(9.45,3.45) 21(9.45,3.95) 22(9.45,4.45) 23(9.45,4.95) 24(9.45,5.45) 25(9.45,5.95) 26(9.45,6.45) 27(9.45,6.95) 28(9.45,7.45) 29(9.45,7.95) 30(9.45,8.45) 31(9.45,8.95) 32(9.45,9.45) 49(-1.95,9.45) 50(-1.95,8.95) 51(-1.95,8.45) 52(-1.95,7.95) 53(-1.95,7.45) 54(-1.95,6.95) 55(-1.95,6.45) 56(-1.95,5.95) 57(-1.95,5.45) 58(-1.95,4.95) 59(-1.95,4.45) 60(-1.95,3.95) 61(-1.95,3.45) 62(-1.95,2.95) 63(-1.95,2.45) 64(-1.95,1.95)
  silkscreen extent -2.35,-0.4 9.85,11.8
TSSOP16 [mil]
  rect 70x15 smd: 1(0,0)
  oval 70x15 smd: 2(0,-25.59) 3(0,-51.18) 4(0,-76.77) 5(0,-102.36) 6(0,-127.95) 7(0,-153.54) 8(0,-179.13) 9(233.86,-179.13) 10(233.86,-153.54) 11(233.86,-127.95) 12(233.86,-102.36) 13(233.86,-76.77) 14(233.86,-51.18) 15(233.86,-25.59) 16(233.86,0)
  silkscreen extent 31,-192 203,13
USB2.5-2H4B [mm] "Connector; USB1.1, Type A, Thru-Hole; 4 Position; Right Angle"
  rect 1.6x1.6 hole 0.92: 1(-13.49,-3.5)
  round 1.6 hole 0.92: 2(-13.49,-1) 3(-13.49,1) 4(-13.49,3.5)
  round 3.8 hole 2.3: 5(-10.78,6.57) 6(-10.78,-6.57)
  silkscreen extent -14.96,-7.25 0,7.25, body extent -14,-7.25 0,7.25, height 7.01
VHG80A_N [mm] "Thin QFP, 80-Leads, Body 12x12mm, Pitch 0.5mm, IPC Medium Density"
  oval 1.8x0.3 smd: 1(-6.55,4.75) 2(-6.55,4.25) 3(-6.55,3.75) 4(-6.55,3.25) 5(-6.55,2.75) 6(-6.55,2.25) 7(-6.55,1.75) 8(-6.55,1.25) 9(-6.55,0.75) 10(-6.55,0.25) 11(-6.55,-0.25) 12(-6.55,-0.75) 13(-6.55,-1.25) 14(-6.55,-1.75) 15(-6.55,-2.25) 16(-6.55,-2.75) 17(-6.55,-3.25) 18(-6.55,-3.75) 19(-6.55,-4.25) 20(-6.55,-4.75) 41(6.55,-4.75) 42(6.55,-4.25) 43(6.55,-3.75) 44(6.55,-3.25) 45(6.55,-2.75) 46(6.55,-2.25) 47(6.55,-1.75) 48(6.55,-1.25) 49(6.55,-0.75) 50(6.55,-0.25) 51(6.55,0.25) 52(6.55,0.75) 53(6.55,1.25) 54(6.55,1.75) 55(6.55,2.25) 56(6.55,2.75) 57(6.55,3.25) 58(6.55,3.75) 59(6.55,4.25) 60(6.55,4.75)
  oval 0.3x1.8 smd: 21(-4.75,-6.55) 22(-4.25,-6.55) 23(-3.75,-6.55) 24(-3.25,-6.55) 25(-2.75,-6.55) 26(-2.25,-6.55) 27(-1.75,-6.55) 28(-1.25,-6.55) 29(-0.75,-6.55) 30(-0.25,-6.55) 31(0.25,-6.55) 32(0.75,-6.55) 33(1.25,-6.55) 34(1.75,-6.55) 35(2.25,-6.55) 36(2.75,-6.55) 37(3.25,-6.55) 38(3.75,-6.55) 39(4.25,-6.55) 40(4.75,-6.55) 61(4.75,6.55) 62(4.25,6.55) 63(3.75,6.55) 64(3.25,6.55) 65(2.75,6.55) 66(2.25,6.55) 67(1.75,6.55) 68(1.25,6.55) 69(0.75,6.55) 70(0.25,6.55) 71(-0.25,6.55) 72(-0.75,6.55) 73(-1.25,6.55) 74(-1.75,6.55) 75(-2.25,6.55) 76(-2.75,6.55) 77(-3.25,6.55) 78(-3.75,6.55) 79(-4.25,6.55) 80(-4.75,6.55)
  silkscreen extent -6.67,-5.25 5.25,5.57, body extent -6,-6 6,6, height 1.6
? [mil]
  oval 12x40 smd: 1(-10,0) 1(0,0) 1(10,0) 2(60.87,0) 2(70.87,0) 2(80.87,0)
  oval 32x12 smd: 1(0,-14) 1(0,14) 2(70.87,-14) 2(70.87,14)
  silkscreen extent -28,-31 98,31

## Part data
C1_Digit_1 C1_Digit_2 C1_Digit_3 C2_Digit_1 C2_Digit_2 C2_Digit_3 C3_Digit_1 C3_Digit_2 C3_Digit_3 C4_Digit_1 C4_Digit_2 C4_Digit_3 C9_Digit_1 C9_Digit_2 C9_Digit_3 C10_Digit_1 C10_Digit_2 C10_Digit_3 C11_Digit_1 C11_Digit_2 C11_Digit_3 C12_Digit_1 C12_Digit_2 C12_Digit_3 C13_Digit_1 C13_Digit_2 C13_Digit_3 C14_Digit_1 C14_Digit_2 C14_Digit_3 C15_Digit_1 C15_Digit_2 C15_Digit_3 C16_Digit_1 C16_Digit_2 C16_Digit_3 C17 C18 C19 C20 C21 C22 C23 C24 C25 C26 C27 C28 C29 C30 C31 C32 C33 C34 C35 C36 C37 C38 C39 C40 C41 C42 C43 C44 C45 C46 C47 C48 C49 C50 C51 C52 C53 C54 C55 C56 C57 C58 C59 C61 C62 C84_Digit_1 C84_Digit_2 C84_Digit_3 Cclk1 CFL1 Cgen1 CIO1 CIO2 CIO3 CIO4 CLED1 CLED2 CLED3 CLED4 Csh1_Digit_1 Csh1_Digit_2 Csh1_Digit_3 Csh2_Digit_1 Csh2_Digit_2 Csh2_Digit_3 Csh3_Digit_1 Csh3_Digit_2 Csh3_Digit_3 Csh4_Digit_1 Csh4_Digit_2 Csh4_Digit_3 Csh5_Digit_1 Csh5_Digit_2 Csh5_Digit_3 Csh6_Digit_1 Csh6_Digit_2 Csh6_Digit_3 Csh7_Digit_1 Csh7_Digit_2 Csh7_Digit_3 Csh8_Digit_1 Csh8_Digit_2 Csh8_Digit_3 Csh9_Digit_1 Csh9_Digit_2 Csh9_Digit_3 Csh10_Digit_1 Csh10_Digit_2 Csh10_Digit_3 Csh11_Digit_1 Csh11_Digit_2 Csh11_Digit_3 Csh12_Digit_1 Csh12_Digit_2 Csh12_Digit_3 Csh13_Digit_1 Csh13_Digit_2 Csh13_Digit_3 Csh14_Digit_1 Csh14_Digit_2 Csh14_Digit_3 Csh15_Digit_1 Csh15_Digit_2 Csh15_Digit_3 Csh16_Digit_1 Csh16_Digit_2 Csh16_Digit_3 Csh17_Digit_1 Csh17_Digit_2 Csh17_Digit_3 Csh18_Digit_1 Csh18_Digit_2 Csh18_Digit_3 Csh19_Digit_1 Csh19_Digit_2 Csh19_Digit_3 Csh20_Digit_1 Csh20_Digit_2 Csh20_Digit_3 Csh21_Digit_1 Csh21_Digit_2 Csh21_Digit_3 Csh22_Digit_1 Csh22_Digit_2 Csh22_Digit_3 Csh23_Digit_1 Csh23_Digit_2 Csh23_Digit_3 Csh24_Digit_1 Csh24_Digit_2 Csh24_Digit_3 Csh25_Digit_1 Csh25_Digit_2 Csh25_Digit_3 Csh26_Digit_1 Csh26_Digit_2 Csh26_Digit_3 Csh27_Digit_1 Csh27_Digit_2 Csh27_Digit_3 Csh28_Digit_1 Csh28_Digit_2 Csh28_Digit_3 Csh29_Digit_1 Csh29_Digit_2 Csh29_Digit_3 Csh30_Digit_1 Csh30_Digit_2 Csh30_Digit_3 Csh31_Digit_1 Csh31_Digit_2 Csh31_Digit_3 Csh32_Digit_1 Csh32_Digit_2 Csh32_Digit_3 Csh33_Digit_1 Csh33_Digit_2 Csh33_Digit_3 Csh34_Digit_1 Csh34_Digit_2 Csh34_Digit_3 Csh35_Digit_1 Csh35_Digit_2 Csh35_Digit_3 Csh36_Digit_1 Csh36_Digit_2 Csh36_Digit_3 CSL1 CSL2 Csup1 Csup3 Csup4 Csup5 Csup6 Csup7 Csup8 Csup16 Csup17 Csup18 Csup19 Csup20 Csup21 Csup22 Cudig1_Digit_1 Cudig1_Digit_2 Cudig1_Digit_3 Cudig2_Digit_1 Cudig2_Digit_2 Cudig2_Digit_3 Cudig3_Digit_1 Cudig3_Digit_2 Cudig3_Digit_3 Cudig4_Digit_1 Cudig4_Digit_2 Cudig4_Digit_3 Cudig5_Digit_1 Cudig5_Digit_2 Cudig5_Digit_3 Cudig6_Digit_1 Cudig6_Digit_2 Cudig6_Digit_3 Cudig7_Digit_1 Cudig7_Digit_2 Cudig7_Digit_3 Cudig8_Digit_1 Cudig8_Digit_2 Cudig8_Digit_3 Cudig9_Digit_1 Cudig9_Digit_2 Cudig9_Digit_3 Cudig10_Digit_1 Cudig10_Digit_2 Cudig10_Digit_3 Cudig11_Digit_1 Cudig11_Digit_2 Cudig11_Digit_3: library part C
C60: library part Cap, "Capacitor"
Csup2 Csup9 Csup10 Csup11 Csup12 Csup13 Csup14 Csup15 Csup_1: library part "C POL"
ExtReset1 R1_Digit_1 R1_Digit_2 R1_Digit_3 R2_Digit_1 R2_Digit_2 R2_Digit_3 R3_Digit_1 R3_Digit_2 R3_Digit_3 R4_Digit_1 R4_Digit_2 R4_Digit_3 R5_Digit_1 R5_Digit_2 R5_Digit_3 R6_Digit_1 R6_Digit_2 R6_Digit_3 R7_Digit_1 R7_Digit_2 R7_Digit_3 R8_Digit_1 R8_Digit_2 R8_Digit_3 R9_Digit_1 R9_Digit_2 R9_Digit_3 R10_Digit_1 R10_Digit_2 R10_Digit_3 R11_Digit_1 R11_Digit_2 R11_Digit_3 R12_Digit_1 R12_Digit_2 R12_Digit_3 R13_Digit_1 R13_Digit_2 R13_Digit_3 R14_Digit_1 R14_Digit_2 R14_Digit_3 R15_Digit_1 R15_Digit_2 R15_Digit_3 R16_Digit_1 R16_Digit_2 R16_Digit_3 R17_Digit_1 R17_Digit_2 R17_Digit_3 R18_Digit_1 R18_Digit_2 R18_Digit_3 R19_Digit_1 R19_Digit_2 R19_Digit_3 R20_Digit_1 R20_Digit_2 R20_Digit_3 R21_Digit_1 R21_Digit_2 R21_Digit_3 R22_Digit_1 R22_Digit_2 R22_Digit_3 R23_Digit_1 R23_Digit_2 R23_Digit_3 R24_Digit_1 R24_Digit_2 R24_Digit_3 R25_Digit_1 R25_Digit_2 R25_Digit_3 R26_Digit_1 R26_Digit_2 R26_Digit_3 R27_Digit_1 R27_Digit_2 R27_Digit_3 R28_Digit_1 R28_Digit_2 R28_Digit_3 R29_Digit_1 R29_Digit_2 R29_Digit_3 R30_Digit_1 R30_Digit_2 R30_Digit_3 R31_Digit_1 R31_Digit_2 R31_Digit_3 R32_Digit_1 R32_Digit_2 R32_Digit_3 R33_Digit_1 R33_Digit_2 R33_Digit_3 R34_Digit_1 R34_Digit_2 R34_Digit_3 R35_Digit_1 R35_Digit_2 R35_Digit_3 R36_Digit_1 R36_Digit_2 R36_Digit_3 R37 R37_Digit_1 R37_Digit_2 R37_Digit_3 R38 R38_Digit_1 R38_Digit_2 R38_Digit_3 R39 R40 R40_Digit_1 R40_Digit_2 R40_Digit_3 R41 R41_Digit_1 R41_Digit_2 R41_Digit_3 R42 R43 R44 R45 R46 R47 R48 R49 R50 R51 R52 R53 RDFL1 RFL1 RFL2 RFL3 RFL4 RFL5 RLED1 RLED2 RLED3 Rsh1_Digit_1 Rsh1_Digit_2 Rsh1_Digit_3 Rsh2_Digit_1 Rsh2_Digit_2 Rsh2_Digit_3 Rsh3_Digit_1 Rsh3_Digit_2 Rsh3_Digit_3 Rsh4_Digit_1 Rsh4_Digit_2 Rsh4_Digit_3 Rsh5_Digit_1 Rsh5_Digit_2 Rsh5_Digit_3 Rsh6_Digit_1 Rsh6_Digit_2 Rsh6_Digit_3 Rsh7_Digit_1 Rsh7_Digit_2 Rsh7_Digit_3 Rsh8_Digit_1 Rsh8_Digit_2 Rsh8_Digit_3 Rsh9_Digit_1 Rsh9_Digit_2 Rsh9_Digit_3 Rsh10_Digit_1 Rsh10_Digit_2 Rsh10_Digit_3 Rsh11_Digit_1 Rsh11_Digit_2 Rsh11_Digit_3 Rsh12_Digit_1 Rsh12_Digit_2 Rsh12_Digit_3 Rsh13_Digit_1 Rsh13_Digit_2 Rsh13_Digit_3 Rsh14_Digit_1 Rsh14_Digit_2 Rsh14_Digit_3 Rsh15_Digit_1 Rsh15_Digit_2 Rsh15_Digit_3 Rsh16_Digit_1 Rsh16_Digit_2 Rsh16_Digit_3 Rsh17_Digit_1 Rsh17_Digit_2 Rsh17_Digit_3 Rsh18_Digit_1 Rsh18_Digit_2 Rsh18_Digit_3 Rsh19_Digit_1 Rsh19_Digit_2 Rsh19_Digit_3 Rsh20_Digit_1 Rsh20_Digit_2 Rsh20_Digit_3 Rsh21_Digit_1 Rsh21_Digit_2 Rsh21_Digit_3 Rsh22_Digit_1 Rsh22_Digit_2 Rsh22_Digit_3 Rsh23_Digit_1 Rsh23_Digit_2 Rsh23_Digit_3 Rsh24_Digit_1 Rsh24_Digit_2 Rsh24_Digit_3 Rsh25_Digit_1 Rsh25_Digit_2 Rsh25_Digit_3 Rsh26_Digit_1 Rsh26_Digit_2 Rsh26_Digit_3 Rsh27_Digit_1 Rsh27_Digit_2 Rsh27_Digit_3 Rsh28_Digit_1 Rsh28_Digit_2 Rsh28_Digit_3 Rsh29_Digit_1 Rsh29_Digit_2 Rsh29_Digit_3 Rsh30_Digit_1 Rsh30_Digit_2 Rsh30_Digit_3 Rsh31_Digit_1 Rsh31_Digit_2 Rsh31_Digit_3 Rsh32_Digit_1 Rsh32_Digit_2 Rsh32_Digit_3 Rsh33_Digit_1 Rsh33_Digit_2 Rsh33_Digit_3 Rsh34_Digit_1 Rsh34_Digit_2 Rsh34_Digit_3 Rsh35_Digit_1 Rsh35_Digit_2 Rsh35_Digit_3 Rsh36_Digit_1 Rsh36_Digit_2 Rsh36_Digit_3 Rsh37_Digit_1 Rsh37_Digit_2 Rsh37_Digit_3 Rsh38_Digit_1 Rsh38_Digit_2 Rsh38_Digit_3 Rsh39_Digit_1 Rsh39_Digit_2 Rsh39_Digit_3 Rsh40_Digit_1 Rsh40_Digit_2 Rsh40_Digit_3 Rsh41_Digit_1 Rsh41_Digit_2 Rsh41_Digit_3 Rsh42_Digit_1 Rsh42_Digit_2 Rsh42_Digit_3 Rsh43_Digit_1 Rsh43_Digit_2 Rsh43_Digit_3 Rsh44_Digit_1 Rsh44_Digit_2 Rsh44_Digit_3 Rsh45_Digit_1 Rsh45_Digit_2 Rsh45_Digit_3 Rsh46_Digit_1 Rsh46_Digit_2 Rsh46_Digit_3 Rsh47_Digit_1 Rsh47_Digit_2 Rsh47_Digit_3 Rsh48_Digit_1 Rsh48_Digit_2 Rsh48_Digit_3 Rsh49_Digit_1 Rsh49_Digit_2 Rsh49_Digit_3 Rsh50_Digit_1 Rsh50_Digit_2 Rsh50_Digit_3 Rsh51_Digit_1 Rsh51_Digit_2 Rsh51_Digit_3 Rsh52_Digit_1 Rsh52_Digit_2 Rsh52_Digit_3 Rsh53_Digit_1 Rsh53_Digit_2 Rsh53_Digit_3 Rsh54_Digit_1 Rsh54_Digit_2 Rsh54_Digit_3 Rsh55_Digit_1 Rsh55_Digit_2 Rsh55_Digit_3 Rsh56_Digit_1 Rsh56_Digit_2 Rsh56_Digit_3 Rsh57_Digit_1 Rsh57_Digit_2 Rsh57_Digit_3 Rsh58_Digit_1 Rsh58_Digit_2 Rsh58_Digit_3 Rsh59_Digit_1 Rsh59_Digit_2 Rsh59_Digit_3 Rsh60_Digit_1 Rsh60_Digit_2 Rsh60_Digit_3 RSL1 RSL2 RSL3 RSL4 RSL5 RSL6 RSL7 RSL8: library part R
L1 L2: library part L
LrefGND1_Digit_1 LrefGND1_Digit_2 LrefGND1_Digit_3: library part DR
Rref1 Rref2: library part MLT
U3_Digit_1 U3_Digit_2 U3_Digit_3: library part ADC3424
U4: "Cyclone IV Family FPGA, 2V Core, 328 I/O Pins, 4 PLLs, 484-Pin FBGA, Speed Grade 7, Commercial Grade"
U5 U7: library part IDC-10
U6: library part EPCS4SI8N, "EPCS4 Series, In-system programmable 3.3V serial configuration device, 8-Pin SOIC, 4-Megabit, Industrial Grade, Pb-Free"
UFL1: "16-Bit Bus LVDS Serializer/Deserializer - 25 - 80 MHz, 80-pin LQFP"
UG1: library part SG-636, "Crystal Oscillator (SMD)"
Uref2 Uref3 Uref6 Uref7: library part NCP1117-3.3V
Uref8: "3-Terminal Adjustable Negative Regulators"
Ush1_Digit_1 Ush1_Digit_2 Ush1_Digit_3 Ush2_Digit_1 Ush2_Digit_2 Ush2_Digit_3 Ush3_Digit_1 Ush3_Digit_2 Ush3_Digit_3 Ush4_Digit_1 Ush4_Digit_2 Ush4_Digit_3: library part AD8005ART
Ush5_Digit_1 Ush5_Digit_2 Ush5_Digit_3 Ush6_Digit_1 Ush6_Digit_2 Ush6_Digit_3 Ush7_Digit_1 Ush7_Digit_2 Ush7_Digit_3 Ush8_Digit_1 Ush8_Digit_2 Ush8_Digit_3: library part AD8008
VDLED1 VDLED2 VDLED3 VDLED4: library part AL307

## Via types
v1: diameter 0.5, hole 0.25, Top Layer to Bottom Layer, tented top, 430 vias
v2: diameter 0.7, hole 0.4, Top Layer to Bottom Layer, 251 vias
v3: diameter 1, hole 0.5, Top Layer to Bottom Layer, 48 vias
v4: diameter 0.6, hole 0.3, Top Layer to Bottom Layer, 31 vias
v5: diameter 1.2, hole 0.7, Top Layer to Bottom Layer, 12 vias
v6: diameter 1.016, hole 0.61, Top Layer to Bottom Layer, 9 vias
v7: diameter 1.27, hole 0.711, Top Layer to Bottom Layer, 9 vias
v8: diameter 5, hole 3, Top Layer to Bottom Layer, 6 vias
v9: diameter 0.8, hole 0.4, Top Layer to Bottom Layer, 4 vias
v10: diameter 0.6, hole 0.3, Top Layer to Bottom Layer, tented top, 2 vias
v11: diameter 1.2, hole 0.8, Top Layer to Bottom Layer, 1 vias

## Nets (pads, with @x,y where several pads share a name; then routed paths per layer and width w, separated by ;. In a path a pad name is that pad's centre, name@x,y a point inside that pad or via, vN(x,y) a via of type N, cw(c..) or ccw(c..) an arc to the next point about the centre after c; other vN are vias at no path point)
3Z3: CFL1.2 RDFL1.2 UDFL1.2 UDFL2.2 UDFL3.2
"+1.2 VDIG": C17.2 C18.2 C19.2 C20.2 C41.2 C42.2 C43.2 C44.2 C45.2 C46.2 C47.2 C48.2 C49.2 C50.2 C51.2 C52.2 Csup15.+ Csup21.1 U4.E17 U4.F6 U4.G12 U4.H9 U4.J10 U4.J11 U4.J12 U4.J13 U4.J14 U4.J16 U4.K9 U4.K14 U4.K15 U4.L9 U4.L14 U4.L16 U4.M9 U4.M14 U4.M15 U4.N9 U4.N14 U4.P9 U4.P10 U4.P11 U4.P12 U4.P13 U4.P14 U4.R8 U4.R10 U4.R12 U4.U6 U4.V17 Uref7.4 | length 141.8
  Top Layer w0.2: v1(135,117.5) U4.E17@135.5,118 ; v1(135,131.5) U4.V17@135.5,131 ; v1(136,121.5) U4.J16@136.5,122 ; v1(136,123.5) U4.L16@136.5,124 ; v1(137,122.5) U4.K15@137.5,123 ; v1(137,125.5) U4.M15@137.5,125 ; v1(138,121.5) U4.J14@138.5,122 ; v1(138,122.5) U4.K14@138.5,123 ; v1(138,123.5) U4.L14@138.5,124 ; v1(138,125.5) U4.M14@138.5,125 ; v1(138,126.5) U4.N14@138.5,126 ; v1(138,127.5) U4.P14@138.5,127 ; v1(139,121.5) U4.J13@139.5,122 ; v1(139,127.5) U4.P13@139.5,127 ; v1(140,119.5) U4.G12@140.5,120 ; v1(140,121.5) U4.J12@140.5,122 ; v1(140,127.5) U4.P12@140.5,127 ; v1(140,128.5) U4.R12@140.5,128 ; U4.J11@141.5,122 v1(142,121.5) ; U4.P11@141.5,127 v1@142,127.5 ; U4.J10@142.5,122 v1(143,121.5) ; U4.P10@142.5,127 v1(143,127.5) ; U4.R10@142.5,128 v1(143,128.5) ; U4.H9@143.5,121 v1(144,120.5) ; U4.K9@143.5,123 v1(144,122.5) ; U4.L9@143.5,124 v1(144,123.5) ; U4.M9@143.5,125 v1(144,125.5) ; U4.N9@143.5,126 v1(144,126.5) ; U4.P9@143.5,127 v1(144,127.5) ; U4.R8@144.5,128 v1(145,128.5) ; U4.F6@146.5,119 v1(147,118.5) ; U4.U6@146.5,130 v1(147,130.5)
  MidLayer1 w0.175: v1(135,117.5) 135.5,118 135.5,123.697 ; v1(135,131.5) 135.5,131 135.5,125.303 ; v1(136,121.5) v1(137,122.5) v1(138,123.5) v1(138,122.5) v1(138,121.5) v1(139,121.5) v1(140,121.5) v1(142,121.5) v1(143,121.5) ; v1(138,125.5) v1(138,126.5) v1(138,127.5) v1(139,127.5) v1(140,127.5) v1(142,127.5) v1(143,127.5) ; v1(143,128.5) v1(143,127.5) ; v1(144,120.5) v1(143,121.5) ; v1(145,128.5) v1(144,127.5) ; v1(147,118.5) 146.5,119 146.5,124.5 146.5,130 v1(147,130.5) ; v1(143,121.5) v1(144,122.5) v1(144,123.5) v1(144,125.5) v1(144,126.5) v1(144,127.5) ; v1(143,127.5) v1(144,127.5)
  MidLayer1 w0.4: 144.2,83 144.2,102.5 154,112.3 154,124.5 146.5,124.5
  Bottom Layer w0.175: C20.2@134.7,117.2 v1(135,117.5) ; C19.2@134.7,131.8 v1(135,131.5) ; v1(136,121.5) 136,121.4 C42.2@136.2,121.2 ; v1(137,122.5) v1(138,123.5) ; v1(139,121.5) v1(140,121.5) ; v1(139,127.5) v1(140,128.5) ; v1(142,121.5) v1(143,121.5) ; v1(143,128.5) v1(144,127.5) ; v1(144,120.5) C48.2@144.3,120.8 ; v1(144,122.5) v1(144,123.5) ; v1(144,125.5) v1(144,126.5) ; v1(147,118.5) 147.2,118.3 C17.2@147.2,118.2 ; v1(147,130.5) C47.2@147.3,130.8
  Bottom Layer w0.2: v1(136,123.5) C51.2@136,123.8 ; v1(137,125.5) v1(138,126.5) ; v1(140,119.5) C18.2@140.4,119.5
"+1.8 V": U3_Digit_1.6 U3_Digit_1.7 U3_Digit_1.10 U3_Digit_1.11 U3_Digit_1.14 U3_Digit_1.15 U3_Digit_1.20 U3_Digit_1.23 U3_Digit_1.28 U3_Digit_1.29 U3_Digit_1.32 U3_Digit_1.33 U3_Digit_1.36 U3_Digit_2.6 U3_Digit_2.7 U3_Digit_2.10 U3_Digit_2.11 U3_Digit_2.14 U3_Digit_2.15 U3_Digit_2.20 U3_Digit_2.23 U3_Digit_2.28 U3_Digit_2.29 U3_Digit_2.32 U3_Digit_2.33 U3_Digit_2.36 U3_Digit_3.6 U3_Digit_3.7 U3_Digit_3.10 U3_Digit_3.11 U3_Digit_3.14 U3_Digit_3.15 U3_Digit_3.20 U3_Digit_3.23 U3_Digit_3.28 U3_Digit_3.29 U3_Digit_3.32 U3_Digit_3.33 U3_Digit_3.36 | length 134.3
  Top Layer w0.2: U3_Digit_3.28@112.1,79.3 v2(112.1,78.4) U3_Digit_3.29@113,78.4 ; U3_Digit_3.23@112.1,81.8 110.8,81.8 110.2,81.2 109.5,81.2 109,81.7 v4(109,82.5) 109,83.3 109.5,83.8 110.2,83.8 110.7,83.3 U3_Digit_3.20@112.1,83.3 ; U3_Digit_3.15@112.1,85.8 v2(112.1,86.7) U3_Digit_3.14@113,86.7 ; U3_Digit_2.28@112.1,119.1 v2(112.1,118.2) U3_Digit_2.29@113,118.2 ; U3_Digit_2.23@112.1,121.6 110.9,121.6 110.3,121 109.5,121 109,121.5 v4(109,122.3) 109,123.1 109.5,123.6 110.3,123.6 110.8,123.1 U3_Digit_2.20@112.1,123.1 ; U3_Digit_2.15@112.1,125.6 v2(112.1,126.5) U3_Digit_2.14@113,126.5 ; U3_Digit_1.28@112.1,158.8 v2(112.1,157.9) U3_Digit_1.29@113,157.9 ; U3_Digit_1.23@112.1,161.3 110.8,161.3 110.2,160.7 109.5,160.7 109,161.2 v4(109,162) 109,162.8 109.5,163.3 110.2,163.3 110.7,162.8 U3_Digit_1.20@112.1,162.8 ; U3_Digit_1.15@112.1,165.3 v2(112.1,166.2) U3_Digit_1.14@113,166.2 ; U3_Digit_3.32@114.5,78.4 114.5,77.3 114.55,77.25 v2(114.75,77.25) 114.95,77.25 115,77.3 U3_Digit_3.33@115,78.4 ; U3_Digit_3.11@114.5,86.7 114.5,87.8 114.55,87.85 v2(114.75,87.85) 114.95,87.85 115,87.8 U3_Digit_3.10@115,86.7 ; U3_Digit_2.32@114.5,118.2 114.5,117.1 114.55,117.05 v2(114.75,117.05) 114.95,117.05 115,117.1 U3_Digit_2.33@115,118.2 ; U3_Digit_2.11@114.5,126.5 114.5,127.6 114.55,127.65 v2(114.75,127.65) 114.95,127.65 115,127.6 U3_Digit_2.10@115,126.5 ; U3_Digit_1.32@114.5,157.9 114.5,156.8 114.55,156.75 v2(114.75,156.75) 114.95,156.75 115,156.8 U3_Digit_1.33@115,157.9 ; U3_Digit_1.11@114.5,166.2 114.5,167.3 114.55,167.35 v2(114.75,167.35) 114.95,167.35 115,167.3 U3_Digit_1.10@115,166.2 ; U3_Digit_3.36@116.5,78.4 116.5,77.3 116.55,77.25 v2(116.75,77.25) ; U3_Digit_3.7@116.5,86.7 116.5,87.8 116.55,87.85 v2(116.75,87.85) 116.95,87.85 117,87.8 U3_Digit_3.6@117,86.7 ; U3_Digit_2.36@116.5,118.2 116.5,117.1 116.55,117.05 v2(116.75,117.05) ; U3_Digit_2.7@116.5,126.5 116.5,127.6 116.55,127.65 v2(116.75,127.65) 116.95,127.65 117,127.6 U3_Digit_2.6@117,126.5 ; U3_Digit_1.36@116.5,157.9 116.5,156.8 116.55,156.75 v2(116.75,156.75) ; U3_Digit_1.7@116.5,166.2 116.5,167.3 116.55,167.35 v2(116.75,167.35) 116.95,167.35 117,167.3 U3_Digit_1.6@117,166.2
  MidLayer1 w0.2: v4(109,82.5) 109,83.3 109.5,83.8 112.1,83.8 ; v4(109,122.3) 109,123.1 109.5,123.6 112.1,123.6 ; v4(109,162) 109,162.8 109.7,163.5 112.1,163.5 ; 112.1,86.1 v2(112.1,86.7) ; v2(116.75,77.25) v2(114.75,77.25) 113.6,78.4 v2(112.1,78.4) 112.1,83.8 ; v2(116.75,87.85) v2(114.75,87.85) 113.25,87.85 v2(112.1,86.7) ; v2(116.75,117.05) v2(114.75,117.05) 113.6,118.2 v2(112.1,118.2) 112.1,123.6 ; v2(116.75,127.65) v2(114.75,127.65) 113.25,127.65 v2(112.1,126.5) 112.1,123.6 ; v2(116.75,156.75) v2(114.75,156.75) 113.6,157.9 v2(112.1,157.9) 112.1,163.5 ; v2(116.75,167.35) v2(114.75,167.35) 113.25,167.35 v2(112.1,166.2) 112.1,163.5 ; 112.1,83.8 v2(112.1,86.7)
"+1.8 VDIG": Csup11.+ Csup17.1 Cudig9_Digit_1.2 Cudig9_Digit_2.2 Cudig9_Digit_3.2 Cudig10_Digit_1.2 Cudig10_Digit_2.2 Cudig10_Digit_3.2 Cudig11_Digit_1.2 Cudig11_Digit_2.2 Cudig11_Digit_3.2 U3_Digit_1.5 U3_Digit_1.38 U3_Digit_1.47 U3_Digit_1.52 U3_Digit_2.5 U3_Digit_2.38 U3_Digit_2.47 U3_Digit_2.52 U3_Digit_3.5 U3_Digit_3.38 U3_Digit_3.47 U3_Digit_3.52 Uref3.4 | length 126.5
  Top Layer w0.175: v1(117,89.5) 117.5,89 U3_Digit_3.5@117.5,86.7 ; U3_Digit_3.38@117.5,78.4 117.5,76 v10(118,75.5) ; U3_Digit_2.38@117.5,118.2 117.5,115.5 v1(118,115) ; U3_Digit_2.5@117.5,126.5 117.5,129 v1(118,129.5) ; U3_Digit_1.5@117.5,166.2 117.5,168.5 v1(118,169) ; U3_Digit_3.47@120.4,81.3 122.3,81.3 v1(122.5,81.5) ; U3_Digit_3.52@120.4,83.8 122.1,83.8 v1(122.5,83.4) ; U3_Digit_2.47@120.4,121.1 122.3,121.1 v1(122.5,121.3) ; U3_Digit_2.52@120.4,123.6 122.1,123.6 v1(122.5,123.2)
  Top Layer w0.2: U3_Digit_1.38@117.5,157.9 117.5,156.1 v4(117.6,156) ; U3_Digit_1.47@120.4,160.8 122.7,160.8 v1(123,160.5) ; U3_Digit_1.52@120.4,163.3 121.2,163.3 122,162.5 v1(122.5,162.5)
  MidLayer1 w0.175: v4(117.6,156) 118.5,156 v1(123,160.5) 122.5,161 v1(122.5,162.5) 122.5,164.5 v1(118,169) 118,156.4 v4(117.6,156) ; v1(118,115) 122.5,119.5 v1(122.5,121.3) v1(122.5,123.2) 122.5,125 v1(118,129.5) v1(118,115)
  MidLayer1 w0.2: v1(117,89.5) 118,88.5 v10(118,75.5) 122.5,80 v1(122.5,81.5) v1(122.5,83.4) 122.5,84 118.1,88.4
"+2.5 V": U7.4
"+2.5 VDIG": C21.2 C22.2 C23.2 C24.2 C25.2 C26.2 C27.2 C28.2 C29.2 C30.2 C31.2 C32.2 C33.2 C34.2 C35.2 C36.2 C37.2 C38.2 C39.2 C40.2 Csup14.+ Csup20.1 U4.A2 U4.A21 U4.AA6 U4.AB2 U4.AB21 U4.D4 U4.D5 U4.D9 U4.D11 U4.D12 U4.D14 U4.D16 U4.D18 U4.E8 U4.E19 U4.F4 U4.F18 U4.G6 U4.G19 U4.H4 U4.J20 U4.K4 U4.L19 U4.N4 U4.P18 U4.R4 U4.T6 U4.T19 U4.U4 U4.U18 U4.V19 U4.W4 U4.W5 U4.W9 U4.W11 U4.W12 U4.W16 U4.W18 U4.Y14 U4.Y19 Uref6.4 | length 105
  Top Layer w0.2: v1(131,113.5) U4.A21@131.5,114 ; v1(131,135.5) U4.AB21@131.5,135 ; v1@132,121.5 U4.J20@132.5,122 ; v1(133,117.5) U4.E19@133.5,118 ; v1(133,119.5) U4.G19@133.5,120 ; v1(133,123.5) U4.L19@133.5,124 ; v1(133,129.5) U4.T19@133.5,129 ; v1(133,131.5) U4.V19@133.5,131 ; v1(133,133.5) U4.Y19@133.5,133 ; v1(134,116.5) U4.D18@134.5,117 ; v1(134,118.5) U4.F18@134.5,119 ; v1(134,127.5) U4.P18@134.5,127 ; v1(134,130.5) U4.U18@134.5,130 ; v1(134,132.5) U4.W18@134.5,132 ; v1(136,116.5) U4.D16@136.5,117 ; v1(136,132.5) U4.W16@136.5,132 ; v1(138,116.5) U4.D14@138.5,117 ; v1(138,133.5) U4.Y14@138.5,133 ; v1(140,116.5) U4.D12@140.5,117 ; v1(140,132.5) U4.W12@140.5,132 ; U4.D11@141.5,117 v1(142,116.5) ; U4.W11@141.5,132 v1(142,132.5) ; U4.D9@143.5,117 v1(144,116.5) ; U4.W9@143.5,132 v1(144,132.5) ; U4.E8@144.5,118 v1(145,117.5) ; U4.G6@146.5,120 v1(147,119.5) ; U4.T6@146.5,129 v1(147,129.5) ; U4.AA6@146.5,134 v1(147,134.5) ; U4.D5@147.5,117 v1(148,116.5) ; U4.W5@147.5,132 v1(148,132.5) ; U4.D4@148.5,117 v1(149,116.5) ; U4.F4@148.5,119 v1(149,118.5) ; U4.H4@148.5,121 v1(149,120.5) ; U4.K4@148.5,123 v1(149,122.5) ; U4.N4@148.5,126 v1(149,126.5) ; U4.R4@148.5,128 v1(149,128.5) ; U4.U4@148.5,130 v1(149,130.5) ; U4.W4@148.5,132 v1(149,132.5) ; U4.A2@150.5,114 v1(151,113.5) ; U4.AB2@150.5,135 v1(151,135.5)
  MidLayer1 w0.175: 131.5,117 132.5,117 v1(133,117.5) v1(134,118.5) v1(133,119.5) 132.5,119 131.5,119 ; v1(133,129.5) v1(134,130.5) v1(133,131.5) v1(134,132.5) v1(133,133.5) ; v1(134,116.5) 134.5,116 134.5,115 ; v1(136,116.5) 136.5,116 136.5,115 ; v1(138,116.5) 138.5,116 138.5,115 ; v1(138,133.5) 138.5,134 139.5,134 ; 141.5,116 143.5,116 v1(144,116.5) v1(145,117.5) ; 143.5,134 143.5,133 v1(144,132.5) ; v1(147,119.5) 147.5,120 148.5,120 v1(149,120.5) 149.5,121 150.5,121 ; v1(148,116.5) 148.5,116 148.5,115 ; v1(149,116.5) 149.5,116 149.5,115 ; v1(149,118.5) 149.5,119 150.5,119 ; v1(149,122.5) 149.5,123 150.5,123
  MidLayer1 w0.2: 133.5,125 133.5,127 v1(134,127.5) ; v1(136,132.5) 136.5,133 136.5,135 ; v1(147,129.5) 147.5,129 148.5,129 ; 148.5,135 148.5,133 v1(148,132.5) v1(149,132.5) ; 149.5,135 149.5,133 v1(149,132.5) ; 148.5,129 148.5,130 v1(149,130.5) ; 148.5,129 v1(149,128.5) ; v1(149,128.5) 148.5,128 148.5,127 v1(149,126.5) 149.5,127 149.5,128 v1(149,128.5) ; v1(149,128.5) 149.5,129 149.5,130 v1(149,130.5) ; v1(149,130.5) 148.5,131 148.5,132 v1(149,132.5) ; v1(149,130.5) 149.5,131 149.5,132 v1(149,132.5)
  Bottom Layer w0.175: C34.2@132.8,129.8 132.8,129.7 v1(133,129.5) C34.2@133,129.6 ; v1(133,133.5) v1(134,132.5) ; C31.2@137.9,133.8 138,133.7 v1(138,133.5) ; v1(144,116.5) v1(145,117.5) ; v1(144,132.5) 144.1,132.5 C33.2@144.3,132.7 ; C40.2@146.946,119.654 147,119.6 v1(147,119.5) ; v1(149,118.5) 149,118.6 C23.2@149.2,118.8
  Bottom Layer w0.2: C36.2@131,112.5 v1(131,113.5) ; v1(131,135.5) C35.2@131,136.5 ; v1(132,121.5) C24.2@132.1,121.5 ; C39.2@132.7,117.8 C39.2@132.7,117.9 ; v1(140,116.5) C29.2@141,116.5 ; v1(140,132.5) v1(142,132.5) ; v1(148,132.5) v1(149,132.5) ; C30.2@148.8,128.8 149,128.6 v1(149,128.5) ; C37.2@151,112.5 v1(151,113.5) ; v1(151,135.5) C38.2@151,136.5
"+3.3 VCLK": Cclk1.2 Cgen1.2 Csup13.+ Csup19.1 Uclk1.1 Uclk1.2 Uclk1.3 Uclk1.4 Uclk1.8 UG1.4 UG2.13 UG3.1 UG3.4 UG3.5 UG3.8 UG3.9 UG3.12 Uref5.4 | length 2.6
  Top Layer w0.4: Uclk1.4@99.5,124.55 Uclk1.1@99.5,126.5 ; UG3.4@105.4,117.55 UG3.5@105.4,118.2